# EAGLE board dcf77kompZDiff (EAGLE 7.7.0)
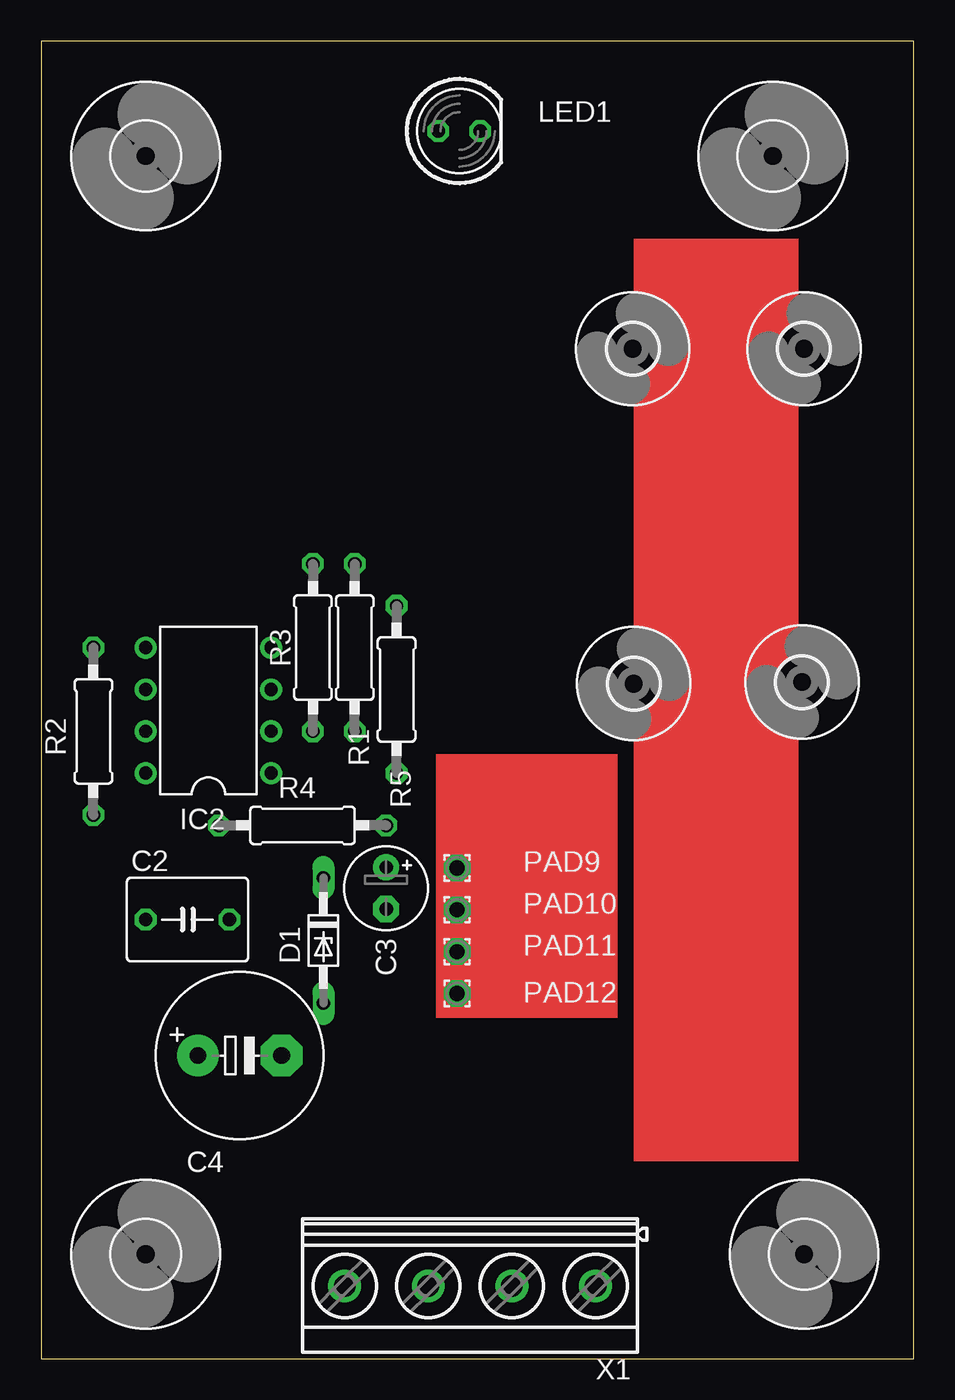
[diagram p0: board, top side]
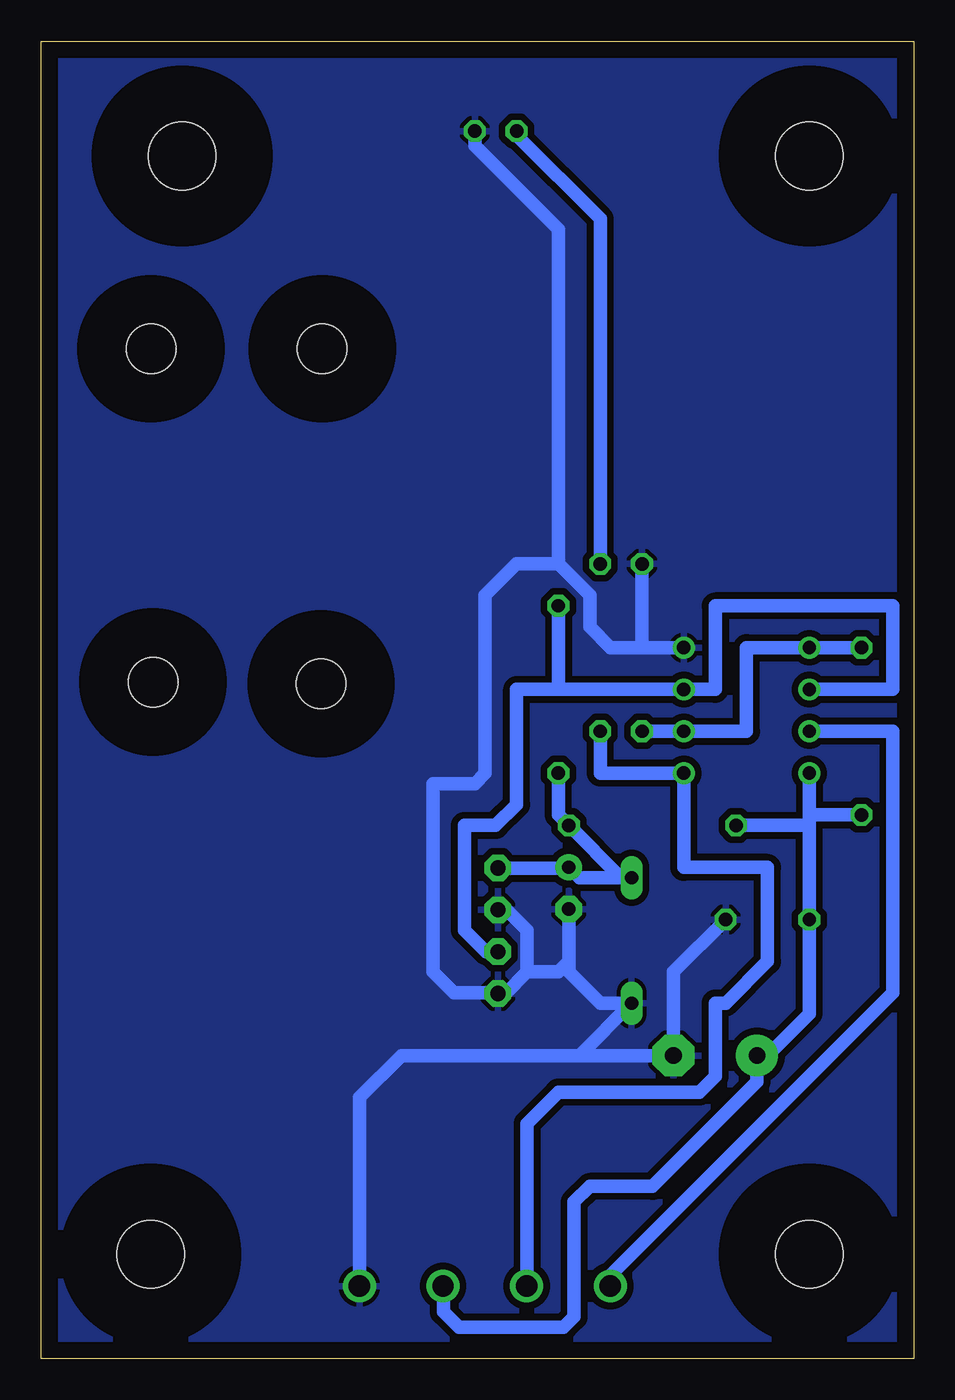
[diagram p1: board, bottom side, seen from below]

Size 53.01 x 80 mm. Coordinates in mm from the lower left corner, seen from the top.
Outline: 0,0 53.01,0 53.01,80 0,80 0,0
Copper layers (1*16): Top 0.035mm / dielectric 1.5mm / Bottom 0.035mm
Design rules "default": minimum track width 10mil, minimum drill 24mil, track to track 8mil, track to pad 8mil, pad to pad 8mil, via to via 8mil, smd to smd 8mil, copper to edge 40mil, drill to drill 8mil, minimum pad ring 10mil, minimum via ring 8mil, stop-mask expansion 4mil, vias tented up to drill 0mil, thermal gap 10mil

## Footprints (pad centres in the part's own frame; a part is rotated, then mirrored left to right if it is on the bottom)
C050-050X075 = drill 0.813 octagon: 1 -2.54,0; 2 2.54,0
E2,5-5 = drill 0.813 pad 1.6: + -1.27,0 | drill 0.813 pad 1.6 octagon: - 1.27,0
E5-10,5 = drill 1.016 pad 2.54: + -2.54,0 | drill 1.016 pad 2.54 octagon: - 2.54,0
DO34Z7 = drill 0.813 long: A 3.81,0; C -3.81,0
DIL08 = drill 0.813 pad 1.27: 1 -3.81,-3.81; 2 -1.27,-3.81; 3 1.27,-3.81; 4 3.81,-3.81; 5 3.81,3.81; 6 1.27,3.81; 7 -1.27,3.81; 8 -3.81,3.81
LED5MM = drill 0.813 octagon: A -1.27,0; K 1.27,0
1,6/0,9 = drill 0.914 pad 1.6 octagon: 1 0,0
0207/10 = drill 0.813 octagon: 1 -5.08,0; 2 5.08,0
4,1 = hole 4.1: 0,0
3,0 = hole 3: 0,0
MKDSN1,5/4-5,08 = drill 1.3 pad 2: 1 -7.641,0.025; 2 -2.561,0.025; 3 2.519,0.025; 4 7.599,0.025

## Placement (x,y rotation side)
C2  1uF  [C050-050X075]  8.89,26.67 0 top
C3  10uF  [E2,5-5]  20.95,28.57 270 top
C4  22uF  [E5-10,5]  12.06,18.41 0 top
D1  3.3V  [DO34Z7]  17.14,25.4 270 top
IC2  LM358N  [DIL08]  10.16,39.37 90 top
LED1  Grün 3mm  [LED5MM]  25.4,74.55 0 top
PAD9  VDD  [1,6/0,9]  25.27,29.8 0 top
PAD10  GND  [1,6/0,9]  25.27,27.26 0 top
PAD11  Data  [1,6/0,9]  25.27,24.72 0 top
PAD12  PON  [1,6/0,9]  25.27,22.18 0 top
R1  470  [0207/10]  19.05,43.18 270 top
R2  22k  [0207/10]  3.17,38.1 270 top
R3  10k  [0207/10]  16.51,43.18 270 top
R4  390  [0207/10]  15.88,32.38 180 top
R5  47k  [0207/10]  21.59,40.64 270 top
U$1  [4,1]  6.35,73.03 0 top
U$2  [4,1]  44.45,73.03 0 top
U$3  [4,1]  46.35,6.35 0 top
U$4  [4,1]  6.35,6.35 0 top
U$5  [3,0]  36,40.99 0 top
U$6  [3,0]  46.22,41.09 0 top
U$7  [3,0]  35.94,61.33 0 top
U$8  [3,0]  46.34,61.33 0 top
X1  [MKDSN1,5/4-5,08]  26.04,4.45 180 top

## Library data of the parts
C2 C3 = rcl
C4 R1-R5 = resistor
D1 = diode
IC2 = linear
LED1 = led
PAD9-PAD12 = wirepad
U$1-U$8 = holes
X1 = con-phoenix-508; MPN: SMKDSN1,5/4-5,08; OC_FARNELL: 1792905; OC_NEWARK: 70R0300

## Nets
GND: C2.2 C3.- C4.- D1.A IC2.4 LED1.K PAD10.1 PAD12.1 R3.1 X1.1
N$1: C3.+ D1.C PAD9.1 R4.1 R5.2
N$2: LED1.A R1.1
N$3: IC2.1 R1.2 X1.3
N$4: IC2.7 X1.4
N$5: IC2.2 IC2.5 R2.1 R3.2
N$6: IC2.3 IC2.6 PAD11.1 R5.1
V+: C2.1 C4.+ IC2.8 R2.2 R4.2 X1.2

## Tracks (layer width: path | path; a pad name or v marks a point on that pad's centre or on a via)
GND
  Bottom 0.813: X1.1 33.68,5.69 33.66,14.92 33.66,15.88 31.11,18.41 20.32,18.41 | 20.32,18.41 C4.- 14.61,23.5 C2.2 | IC2.4 16.51,43.18 | 16.51,43.18 R3.1 | 20.32,18.41 D1.A 19.05,21.59 20.95,23.5 20.95,24.13 | 23.5,23.5 23.5,26.04 24.77,27.3 25.4,27.3 25.36,27.26 PAD10.1 | 23.5,23.5 24.81,22.18 PAD12.1 25.32,22.23 27.94,22.23 29.21,23.5 29.21,34.92 26.67,34.92 26.04,35.56 26.04,46.35 24.13,48.26 21.59,48.26 | 23.5,23.5 21.59,23.5 20.95,24.13 | 20.95,24.13 C3.- | 16.51,43.18 18.41,43.18 19.68,44.45 19.68,46.35 21.59,48.26 | LED1.K 26.67,73.66 21.59,68.58 21.59,48.26
  pour Bottom (isolate 0.406): -0.32,80.33 53.66,80.33 53.66,-0.64 -0.32,-0.64
N$1
  Bottom 0.813: R5.2 21.59,33.02 R4.1 17.78,29.21 D1.C 20.32,29.21 C3.+ 21,29.8 PAD9.1
N$2
  Bottom 0.813: R1.1 19.05,69.22 24.13,74.3 LED1.A
N$3
  Bottom 0.813: R1.2 19.05,35.56 IC2.1 13.97,29.84 8.89,29.84 8.89,24.13 11.43,21.59 12.06,21.59 12.06,17.14 13.02,16.19 21.59,16.19 23.5,14.29 23.5,4.44 X1.3
N$4
  Bottom 0.813: IC2.7 1.27,38.1 1.27,22.23 18.41,5.08 18.41,4.44 X1.4
N$5
  Bottom 0.813: R3.2 IC2.2 10.16,38.1 10.16,43.18 IC2.5 R2.1
N$6
  Bottom 0.813: IC2.6 1.27,40.64 1.27,45.72 12.06,45.72 12.06,40.64 IC2.3 21.59,40.64 | R5.1 21.59,40.64 | PAD11.1 25.99,24.72 27.3,26.04 27.3,32.38 25.4,32.38 24.13,33.66 24.13,40.64 21.59,40.64
N$7
  pour Bottom (isolate 0.406): 0.32,47.62 52.39,47.62 52.39,0.32 0.64,0.32 0.64,1.91 0.32,1.91
V+
  Bottom 0.813: 6.35,32.38 C2.1 6.35,20.95 8.89,18.41 C4.+ 9.53,16.83 15.88,10.48 19.68,10.48 20.64,9.53 20.64,2.54 21.27,1.91 27.62,1.91 28.57,2.86 28.57,4.4 X1.2 | 6.35,32.38 6.35,33.02 | 6.35,33.02 R2.2 | IC2.8 6.35,33.02 | R4.2 6.35,32.38
(copper drawn outside any net)
  shapes: Top area x2